# Altium PCB PCB1.PcbDoc
Units mm, origin at the board's own origin, x right, y up, seen from the top; angles counter-clockwise.
Board outline 45 x 118 mm, 2 copper layers (Top Layer, Bottom Layer), stack 1.671 mm thick; 24 components, 34 nets, 95 pads, 10 vias.
Unrouted connection lines stored in the file: 1.
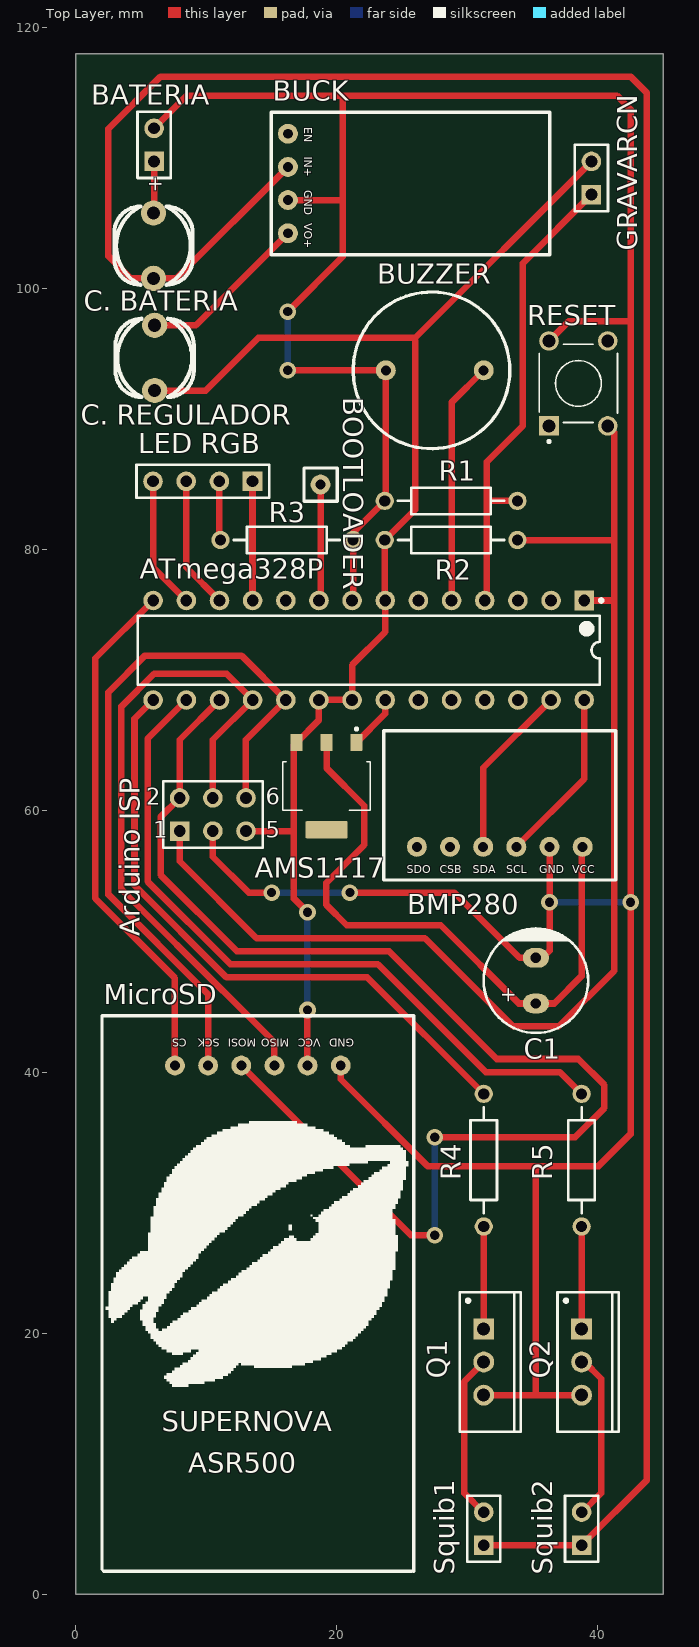
[diagram p0: Top Layer view]
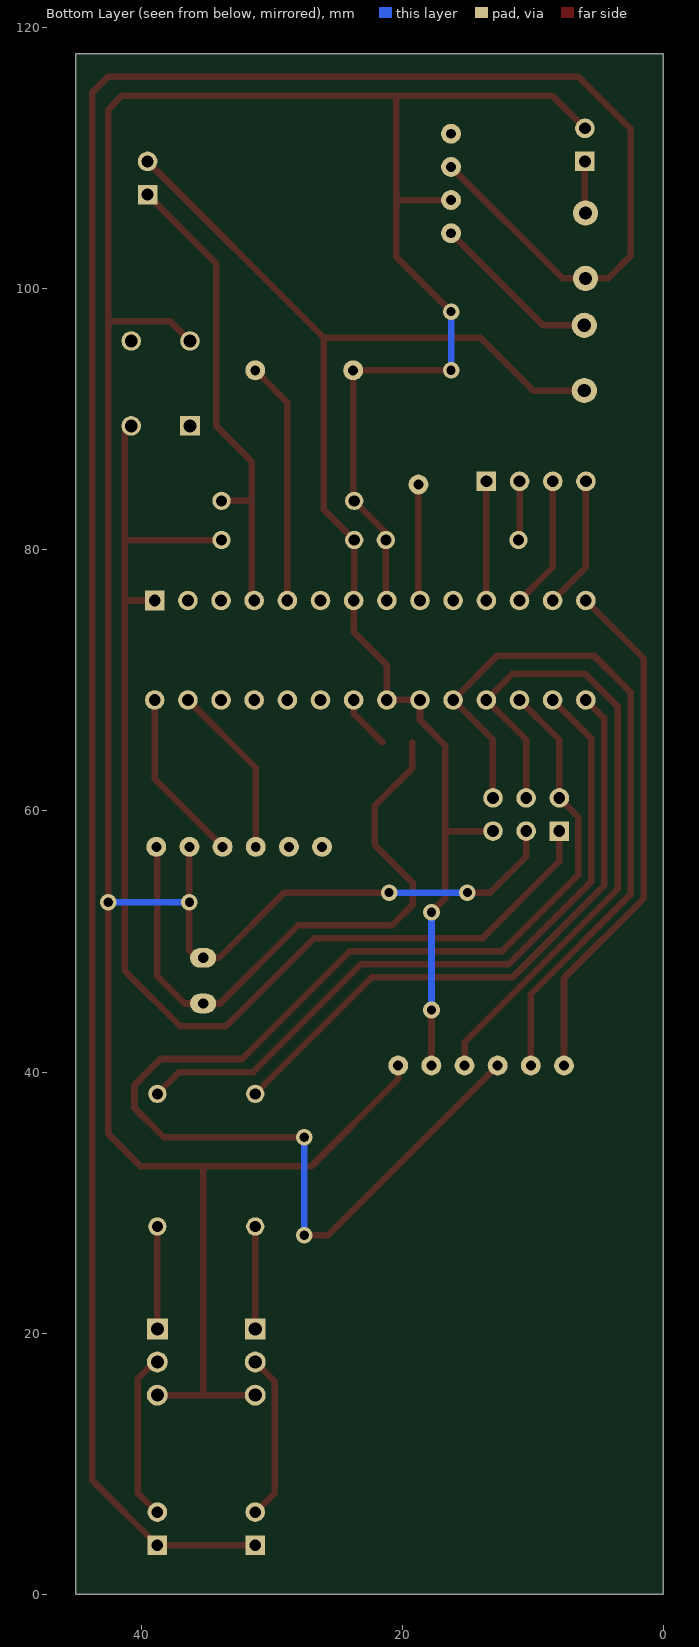
[diagram p1: Bottom Layer view, seen from below]

## Layer stack, top to bottom
Top Solder: solder mask 0.0102, Solder Resist, Dk 3.5
Top Layer: signal copper 0.0356
Dielectric 1: dielectric 1.6, FR-4, Dk 4.8
Bottom Layer: signal copper 0.0356
Bottom Solder: solder mask 0.0102, Solder Resist, Dk 3.5

## Board outline
0,0 0,118 45,118 45,0

## Design rules (kind name [scope] priority, off if disabled: settings)
Clearance [All] p1: gap=0.3 ignorepadtopadclearanceinfootprint=FALSE
PolygonConnect [All] p1: connectstyle=Relief reliefconductorwidth=0.254 reliefentries=4 polygonreliefangle="90 Angle" airgapwidth=0.254
RoutingVias [All] p1: holewidth=0.3 width=0.6 viastyle="Through Hole" minholewidth=0.3 minwidth=0.6 maxholewidth=0.3 maxwidth=0.6
SolderMaskExpansion [All] p1: expansion=0.102
Width [All] p1: maxlimit=1 minlimit=0.3 preferedwidth=0.5
30 further rules are at their usual default settings.

## Components (designator, comment, footprint, x,y, rotation, side; value= is the part's Value field where it differs from the comment)
AMS1117 "AMS1117-3.3" SOT229P700X180-4N 19.21,61.905 r180 top
"Arduino ISP" "Header 3X2" HDR2X3 7.96,58.46 r0 top
ATmega328P "ATmega328P-PU" 28P3 22.44,72.31 r270 top
BATERIA "Battery" BAT-2 6,111.02 r90 top (schematic designator Bateria)
BMP280 "BMP280 Module" "BMP280 Module" 26.13,57.25 r0 top
BOOTLOADER "HEADER1" HEADER1 18.75,85 r90 top
BUCK "MP2315 Buck Module" "MP2315 Buck Module" 16.25,111.87 r270 top
BUZZER "Buzzer" BUZZER 31.25,93.75 r180 top
C1 "10µF" "CAP AL TH D8 L3.5 H12.5" 35.25,47 r90 top
"C. BATERIA" "EVQ-11L07K" EVQ11 6,103.25 r270 top (schematic designator CHAVEBATERIA)
"C. REGULADOR" "EVQ-11L07K" EVQ11 6,94.75 r90 top (schematic designator CHAVEREGULADOR)
GRAVARCN "Header 2" HDR1X2 39.5,107.21 r90 top (schematic designator BOTAOGRAVARCN)
"LED RGB" "Header 4" HDR1X4 13.54,85.25 r180 top
MicroSD "MicroSD Card Module" "MicroSD Card Module" 20.3,40.5 r180 top
Q1 "TIP122" TO-220AB 31.25,17.79 r270 top
Q2 "TIP122" TO-220AB 38.75,17.79 r270 top
R1 "Res2" AXIAL-0.4 28.75,83.75 r0 top value=10K
R2 "Res2" AXIAL-0.4 28.75,80.75 r180 top value=10K
R3 "Res2" AXIAL-0.4 16.17,80.75 r180 top value=1K
R4 "Res2" AXIAL-0.4 31.25,33.25 r270 top value=580
R5 "Res2" AXIAL-0.4 38.75,33.25 r270 top value=10K
RESET "1825910-6" SW_1825910-6-4 38.5,92.75 r90 top (schematic designator BOTAORESET)
Squib1 "Header 2" HDR1X2 31.25,3.75 r90 top
Squib2 "Header 2" HDR1X2 38.75,3.75 r90 top

## Footprints (in the part's own frame and the unit in brackets; to place one, negate y for a bottom-side part, rotate by r counter-clockwise, add the part's x,y. Pads: shape width x height; smd on the part's side, far side on the other; paste and mask are expansions set on the pad)
28P3 [mm] "DIP, 28-Leads, Row Spacing 7.62mm, Pitch 2.54mm, Body 34.67x7.3mm"
  rect 1.5x1.5 hole 0.9: 1(-3.81,16.51)
  round 1.5 hole 0.9: 2(-3.81,13.97) 3(-3.81,11.43) 4(-3.81,8.89) 5(-3.81,6.35) 6(-3.81,3.81) 7(-3.81,1.27) 8(-3.81,-1.27) 9(-3.81,-3.81) 10(-3.81,-6.35) 11(-3.81,-8.89) 12(-3.81,-11.43) 13(-3.81,-13.97) 14(-3.81,-16.51) 15(3.81,-16.51) 16(3.81,-13.97) 17(3.81,-11.43) 18(3.81,-8.89) 19(3.81,-6.35) 20(3.81,-3.81) 21(3.81,-1.27) 22(3.81,1.27) 23(3.81,3.81) 24(3.81,6.35) 25(3.81,8.89) 26(3.81,11.43) 27(3.81,13.97) 28(3.81,16.51)
  silkscreen extent -3.93,-17.7 2.65,17.94, body extent -3.6,-17.65 3.6,17.65, height 4.58
AXIAL-0.4 [mm] "Axial Device, Thru-Hole; 2 Leads; 0.4 in Pin Spacing"
  round 1.4 hole 0.85: 1(-5.08,0) 2(5.08,0)
  silkscreen extent -4.06,-1.02 4.06,1.02
BAT-2 [mm] "Battery; 2 Leads"
  rect 1.5x1.5 hole 0.9: 1(-1.27,0)
  round 1.5 hole 0.9: 2(1.27,0)
  silkscreen extent -2.54,-1.27 2.54,1.27
"BMP280 Module" [mil]
  round 60 hole 30: 1(500,0) 2(400,0) 3(300,0) 4(200,0) 5(100,0) 6(0,0)
  silkscreen extent -100,-100 600,350
BUZZER [mil]
  round 60 hole 30: 1(0,0) 2(295.28,0)
  silkscreen extent -79,-236 394,236
"CAP AL TH D8 L3.5 H12.5" [mm] "8MM Diameter, 3.5MM Lead Spacing Aluminium Capacitor"
  oval 1.5x2 hole 0.8: 1(-1.75,0) 2(1.75,0)
  silkscreen extent -4,-4 4,4, body extent -4,-4 4,4, height 11.5
EVQ11 [mil]
  round 76 hole 39.37: 1(-100.31,-1.89) 2(96.54,-1.89)
  silkscreen extent -120,-120 116,116
HDR1X2 [mm] "Connector; Header; 2 Position"
  rect 1.5x1.5 hole 0.9: 1(0,0)
  round 1.5 hole 0.9: 2(2.54,0)
  silkscreen extent -1.27,-1.27 3.81,1.27
HDR1X4 [mm] "Connector; Header; 4 Position"
  rect 1.5x1.5 hole 0.9: 1(0,0)
  round 1.5 hole 0.9: 2(2.54,0) 3(5.08,0) 4(7.62,0)
  silkscreen extent -1.27,-1.27 8.89,1.27
HDR2X3 [mm] "Connector; Header; 3x2 Position"
  rect 1.5x1.5 hole 0.9: 1(0,0)
  round 1.5 hole 0.9: 2(0,2.54) 3(2.54,0) 4(2.54,2.54) 5(5.08,0) 6(5.08,2.54)
  silkscreen extent -1.27,-1.27 6.35,3.81
HEADER1 [mil]
  round 60 hole 30: 1(0,0)
  silkscreen extent -50,-50 50,50
"MicroSD Card Module" [mil]
  round 60 hole 30: 1(0,0) 2(100,0) 3(200,0) 4(300,0) 5(400,0) 6(500,0)
  silkscreen extent -220,-150 720,1525
"MP2315 Buck Module" [mil]
  round 60 hole 30: 1(0,0) 2(100,0) 3(200,0) 4(300,0)
  silkscreen extent -65,-50 365,790
SOT229P700X180-4N [mm]
  rrect15% 0.93x1.31 smd: 1(-2.29,-3.345) 2(0,-3.345) 3(2.29,-3.345)
  rrect15% 3.24x1.31 smd: 4(0,3.345)
  silkscreen extent -3.36,-4.47 3.36,1.86
SW_1825910-6-4 [mm]
  rect 1.498x1.498 hole 0.99: 1(-3.25,2.25)
  round 1.498 hole 0.99: 2(3.25,2.25) 3(-3.25,-2.25) 4(3.25,-2.25)
  silkscreen extent -4.54,-3 3,3
TO-220AB [mm] "TO, Thru-Hole, Vertical, Heatsink Mounted; 3 In-Line Leads; Pitch 2.54 mm"
  rect 1.6x1.6 hole 1: 1(-2.54,0)
  round 1.6 hole 1: 2(0,0) 3(2.54,0)
  silkscreen extent -5.35,-1.85 5.35,2.85, body extent -5.4,-1.9 5.4,2.9, height 19.3

## Part data
AMS1117: "Sot223/Pkg 1-Amp 3.3-Volt Low Drop Out Voltage Regulatator", Package=None, Availability=Unavailable, MF="Advanced Monolithic Systems", MP=AMS1117-3.3, Price=None, SnapEDA_Link=https://www.snapeda.com/parts/AMS1117-3.3/Advanced%20Monolithic%20Systems/view-part/53450/?ref=snap
"Arduino ISP": "Header, 3-Pin, Dual row", LatestRevisionDate=17-Jul-2002, LatestRevisionNote="Re-released for DXP Platform.", Publisher="Altium Limited"
ATmega328P: "8-bit AVR Microcontroller, 32KB Flash, 1KB EEPROM, 2KB SRAM, 28-pin PDIP, Industrial Grade (-40°C to 85°C)", Supplier Part Number 1=ATMEGA328P-PU-ND, ComponentLink1Description="Manufacturer Link", ComponentLink1URL=http://www.atmel.com/products/avr/default.asp?, ComponentLink2Description="ATmega48A/48PA/88A/88PA/168A/168PA/328/328P Datasheet", ComponentLink2URL=http://www.atmel.com/dyn/resources/prod_documents/8271.pdf, ComponentLink3Description="ATmega48A/48PA/88A/88PA/168A/168PA/328/328P Summary", ComponentLink3URL=http://www.atmel.com/dyn/resources/prod_documents/8271S.pdf, ComponentLink4Description="Atmel.com Home", ComponentLink4URL=http://www.atmel.com, DatasheetVersion="revA, Jan-2010", PackageDescription="28-lead (0.300\"/7.62mm Wide) Plastic Dual Inline Package (PDIP)", PackageReference=28P3, PackageVersion="revB, Sep-2001", Published=1-Apr-2010, Publisher="Altium Limited", Supplier 1=Digi-Key, Supplier 2=Farnell, Supplier 3=Mouser, Supplier Part Number 2=1715487, Supplier Part Number 3=556-ATMEGA328P-PU
BATERIA: "Multicell Battery", LatestRevisionDate=17-Jul-2002, LatestRevisionNote="Re-released for DXP Platform.", PackageDescription="Battery; 2 Leads", PackageReference=BAT-2, Published=24-Mar-1999, Publisher="Altium Limited"
BMP280: "BMP280 Module REF. 9SS08"
C1: library part UKL2A100MPD1TD, "CAP ALUM 10UF 20% 100V RADIAL", Device Package="Radial, Can", Lifetime @ Temp.="2000 Hrs @ 85°C", Manufacturer=Nichicon, Operating Temperature="-40°C ~ 85°C", Ripple Current @ High Frequency="180mA @ 10kHz", Ripple Current @ Low Frequency="90mA @ 120Hz", Supplier Part Number 1=493-10590-1-ND, Tolerance=±20%, Voltage - Rated=100V, Applications="General Purpose", Capacitance=10µF, ComponentLink1Description=Datasheet, ComponentLink1URL=http://nichicon-us.com/english/products/pdfs/e-ukl.pdf, ComponentLink2Description="DigiKey Link", ComponentLink2URL=http://digikey.com/product-detail/en/nichicon/UKL2A100MPD1TD/493-10590-1-ND/4317611, Height - Seated (Max)="0.492\" (12.50mm)", LastUpdated="21/01/2020 03:40:57", Lead Spacing="0.138\" (3.50mm)", Lifecycle Status=Active, Minimum Order=1, Mounting Type="Through Hole", Package / Case="Radial, Can", Packaging=TapeAndBox, PartId=7259, Part Number=UKL2A100MPD1TD, Part Status=Active, Polarization=Polar, Price=0.13, Series=UKL, Size / Dimension="0.315\" Dia (8.00mm)", Supplier 1=DigiKey
"C. BATERIA" "C. REGULADOR": "Tactile Switch SPST-NO Top Actuated Through Hole", Package=None, Availability=Unavailable, MF=Panasonic, MP=EVQ-11L07K, Price=None, SnapEDA_Link=https://www.snapeda.com/parts/EVQ-11L07K/Panasonic%20Electronic%20Components/view-part/310716/?ref=snap
GRAVARCN Squib1 Squib2: "Header, 2-Pin", LatestRevisionDate=17-Jul-2002, LatestRevisionNote="Re-released for DXP Platform.", Publisher="Altium Limited"
"LED RGB": "Header, 4-Pin", LatestRevisionDate=17-Jul-2002, LatestRevisionNote="Re-released for DXP Platform.", Publisher="Altium Limited"
MicroSD: "MicroSD Card Module REF. 4MD36"
Q1 Q2: "Trans Darlington NPN 100V 5A 2000mW Automotive 3-Pin(3+Tab) TO-220 Bag", Package=None, Availability=Unavailable, DigiKey-Purchase-URL=https://snapeda.com/shop?store=DigiKey&id=4804824, MF="NTE Electronics, Inc", Mouser-Purchase-URL=https://snapeda.com/shop?store=Mouser&id=4804824, MP=TIP122, Price=None, SnapEDA_Link=https://www.snapeda.com/parts/TIP122/NTE%20Electronics/view-part/4804824/?ref=snap
R1 R2 R3 R4 R5: "Resistor", LatestRevisionDate=17-Jul-2002, LatestRevisionNote="Re-released for DXP Platform.", PackageDescription="Axial Device, Thru-Hole; 2 Leads; 0.4 in Pin Spacing", PackageReference=AXIAL-0.4, Published=8-Jun-2000, Publisher="Altium Limited"
RESET: "Switch Push Button OFF _ON_ SPST Round Button 0.05A 24VDC Momentary Contact PC Pins Thru-Hole", Contact_Current_Rating="50 mA", Package=None, Configuration_Pole-Throw="Single Pole - Single Throw", Digi-Key_Part_Number=450-1650-ND, Digi-Key_Purchase_URL=https://www.digikey.com/product-detail/en/te-connectivity-alcoswitch-switches/1825910-6/450-1650-ND/1632536?utm_source=snapeda&utm_medium=aggregator&utm_campaign=symbol, EU_RoHS_Compliance=Compliant, MF="TE Connectivity", MP=1825910-6, SnapEDA_Link=https://www.snapeda.com/parts/1825910-6/TE%20Connectivity%20ALCOSWITCH%20Switches/view-part/424522/?ref=snap, TE_purchase_URL=https://www.te.com/usa-en/product-1825910-6.html?te_bu=Cor&te_type=disp&te_campaign=seda_glo_cor-seda-global-disp-prtnr-fy19-seda-model-bom-cta_sma-317_1&elqCampaignId=32493

## Via types
v1: diameter 1.27, hole 0.711, Top Layer to Bottom Layer, 10 vias

## Nets (pads, with @x,y where several pads share a name; then routed paths per layer and width w, separated by ;. In a path a pad name is that pad's centre, name@x,y a point inside that pad or via, vN(x,y) a via of type N, cw(c..) or ccw(c..) an arc to the next point about the centre after c; other vN are vias at no path point)
1: "Arduino ISP.1" ATmega328P.1 R2.1 RESET.3 | length 94.3
  Top Layer w0.5: 7.96,58.46 7.96,56.14 13.85,50.25 26.75,50.25 33.5,43.5 37,43.5 41.25,47.75 41.25,76.25 ; R2.1 41.25,80.75 ; ATmega328P.1 41.12,76.12 41.25,76.25 ; RESET.3 41.25,89 41.25,80.75 ; 41.25,76.25 41.25,80.75
2: ATmega328P.2
3: ATmega328P.3
3V3: AMS1117.2 BMP280.1 C1.1 | length 48.3
  Top Layer w0.5: AMS1117.2 19.21,63.29 22.1,60.4 22.1,57.4 19.2,54.5 19.2,52.8 20.75,51.25 27.95,51.25 33.95,45.25 C1.1 36.65,45.25 38.75,47.35 38.75,57.17 BMP280.1
4: ATmega328P.4 GRAVARCN.1 R1.2 | length 36.8
  Top Layer w0.5: ATmega328P.4 31.5,76.29 31.5,83.75 ; R1.2 31.5,83.75 ; GRAVARCN.1 34.25,101.96 34.25,89.5 31.5,86.75 31.5,83.75
5: ATmega328P.5 BUZZER.1 | length 18.6
  Top Layer w0.5: ATmega328P.5 28.79,91.29 BUZZER.1
5V: "C. REGULADOR.2" BUCK.4 | length 13.1
  Top Layer w0.5: 6.048,97.202 9.202,97.202 BUCK.4
6: ATmega328P.6
9: ATmega328P.9 BOOTLOADER.1 | length 8.9
  Top Layer w0.5: ATmega328P.9 18.75,76.24 BOOTLOADER.1
10: ATmega328P.10
11: "LED RGB.1" ATmega328P.11 | length 9.1
  Top Layer w0.5: 13.54,85.25 13.54,76.13 ATmega328P.11
12: "LED RGB.3" ATmega328P.12 | length 10.2
  Top Layer w0.5: 8.46,85.25 8.46,78.67 ATmega328P.12
13: "LED RGB.4" ATmega328P.13 | length 10.2
  Top Layer w0.5: 5.92,85.25 5.92,78.67 ATmega328P.13
14: ATmega328P.14 MicroSD.6 | length 40
  Top Layer w0.5: ATmega328P.14 1.5,71.69 1.5,53.3 7.6,47.2 MicroSD.6
15: ATmega328P.15 R4.1 | length 48.2
  Top Layer w0.5: ATmega328P.15 4.5,67.07 4.5,54.3 11.55,47.25 22.33,47.25 R4.1
16: ATmega328P.16 R5.1 | length 55.1
  Top Layer w0.5: ATmega328P.16 5.5,65.53 5.5,54.6 11.85,48.25 23.15,48.25 31.4,40 37.08,40 R5.1
17: "Arduino ISP.2" ATmega328P.17 MicroSD.4 | length 99.3
  Top Layer w0.5: ATmega328P.17 7.96,65.45 7.96,61 6.5,59.54 6.5,55.1 12.35,49.25 24,49.25 32.25,41 38.5,41 40.5,39 40.5,37.25 38.25,35 v1(27.5,35) ; MicroSD.4 25.68,27.5 v1(27.5,27.5)
  Bottom Layer w0.5: v1(27.5,27.5) v1(27.5,35)
18: "Arduino ISP.4" ATmega328P.18 MicroSD.3 | length 53
  Top Layer w0.5: 10.5,61 10.5,65.45 ATmega328P.18 11.55,70.5 6,70.5 3.5,68 3.5,54 4.1,53.4 4.1,53.387 11.287,46.2 11.3,46.2 15.22,42.28 MicroSD.3
19: "Arduino ISP.6" ATmega328P.19 MicroSD.5 | length 56.7
  Top Layer w0.5: MicroSD.5 10.14,45.96 2.5,53.6 2.5,69.1 5.3,71.9 12.69,71.9 ATmega328P.19 13.04,65.45 13.04,61
23: ATmega328P.23
24: ATmega328P.24
25: ATmega328P.25
26: ATmega328P.26
27: ATmega328P.27 BMP280.4 | length 13.4
  Top Layer w0.5: BMP280.4 31.21,63.3 ATmega328P.27
28: ATmega328P.28 BMP280.3 | length 13.4
  Top Layer w0.5: BMP280.3 38.95,62.45 ATmega328P.28
GND: "Arduino ISP.3" AMS1117.1 ATmega328P.8 ATmega328P.22 BATERIA.2 BMP280.2 BUCK.3 BUZZER.2 C1.2 MicroSD.1 Q1.3 Q2.3 R1.1 R3.1 RESET.2 | length 278.4
  Top Layer w0.5: BATERIA.2 8.51,114.8 20.46,114.8 ; 10.5,58.46 10.5,56.5 13.25,53.75 v1(15,53.75) ; v1(16.25,93.75) BUZZER.2 23.75,83.83 R1.1 21.25,81.33 R3.1 21.25,76.2 ATmega328P.8 ; v1(16.25,98.25) 20.46,102.46 20.46,106.79 ; BUCK.3 20.46,106.79 ; MicroSD.1 20.3,39.45 26.95,32.8 35.25,32.8 ; v1(21,53.75) 29,53.75 34,48.75 C1.2 35.75,48.75 36.29,49.29 v1(36.29,53) BMP280.2 ; AMS1117.1 23.71,67.46 ATmega328P.22 ; Q1.3 35.25,15.25 ; RESET.2 37.75,97.5 42.5,97.5 ; Q2.3 35.25,15.25 ; 20.46,106.79 20.46,114.8 ; 20.46,114.8 41.45,114.8 42.5,113.75 42.5,97.5 ; 35.25,15.25 35.25,32.8 ; 35.25,32.8 40.05,32.8 42.5,35.25 42.5,97.5
  Bottom Layer w0.5: v1(15,53.75) v1(21,53.75) v1@21.25,53.75 ; v1(16.25,93.75) v1(16.25,98.25) ; v1(36.29,53) v1(42.5,53)
"NetLED RGB_2": "LED RGB.2" R3.2 | length 4.5
  Top Layer w0.5: 11,85.25 11,80.84 R3.2
NetQ1_1: Q1.1 R4.2 | length 7.8
  Top Layer w0.5: Q1.1 R4.2
NetQ2_1: Q2.1 R5.2 | length 7.8
  Top Layer w0.5: Q2.1 R5.2
NO1: Q1.2 Squib1.2 | length 12.8
  Top Layer w0.5: Q1.2 29.75,16.29 29.75,7.75 31.21,6.29 Squib1.2 Squib1.2@31.29,6.29
NO2: Q2.2 Squib2.2 | length 12.9
  Top Layer w0.5: Squib2.2 38.79,6.29 40.25,7.75 40.25,16.5 38.96,17.79 Q2.2
PLUSLE: "C. BATERIA.1" BATERIA.1 | length 4
  Top Layer w0.5: 5.952,105.798 6,105.846 BATERIA.1
VCC: "Arduino ISP.5" "C. REGULADOR.1" AMS1117.3 ATmega328P.7 ATmega328P.20 ATmega328P.21 GRAVARCN.2 MicroSD.2 R2.2 | length 105.7
  Top Layer w0.5: 6.048,92.202 9.952,92.202 14,96.25 26,96.25 GRAVARCN.2 ; 13.04,58.46 16.71,58.46 ; v1(17.75,44.75) 17.75,40.51 MicroSD.2 ; v1(17.75,52.25) 16.71,53.29 16.71,58.46 ; 26,96 26,83.08 R2.2 23.67,76.16 ATmega328P.7 23.71,73.71 21.17,71.17 ATmega328P.21 ATmega328P.20 18.63,66.96 AMS1117.3 16.71,65.04 16.71,58.46
  Bottom Layer w0.5: v1(17.75,44.75) v1(17.75,52.25)
VCC1: "C. BATERIA.2" BUCK.2 Squib1.1 Squib2.1 | length 192
  Top Layer w0.5: BUCK.2 7.718,100.798 5.952,100.798 4.202,100.798 2.5,102.5 2.5,112.25 6.5,116.25 42.5,116.25 43.75,115 43.75,8.75 Squib2.1 Squib1.1
pads on no net: AMS1117.4 BMP280.5 BMP280.6 BUCK.1 RESET.1 RESET.4

## Silkscreen, mask and mechanical layers (free items; w line width, h text height)
Top Overlay:
  drawing of 2 lines, arcs and shapes, not listed
  text "SUPERNOVA" at 6.6,12.5 h1.52
  text "ASR500" at 8.6,9.3 h1.52

## Text inside footprints (layer, text, board x,y; h text height)
"Arduino ISP": Top Overlay "6" at 14.564,60.492 h1.27; Top Overlay "5" at 14.564,57.952 h1.27; Top Overlay "2" at 5.42,60.492 h1.27; Top Overlay "1" at 5.928,57.952 h1.27
BATERIA: Top Overlay "+" at 6.577,107.35 h1.15 r90
BMP280: Top Overlay "VCC" at 38.043,55.218 h0.61; Top Overlay "GND" at 35.503,55.218 h0.61; Top Overlay "SCL" at 32.963,55.218 h0.61; Top Overlay "SDA" at 30.423,55.218 h0.61; Top Overlay "CSB" at 27.883,55.218 h0.61; Top Overlay "SDO" at 25.343,55.218 h0.61
BUCK: Top Overlay "VO+" at 17.52,105.012 h0.61 r270; Top Overlay "GND" at 17.52,107.552 h0.61 r270; Top Overlay "IN+" at 17.52,110.092 h0.61 r270; Top Overlay "EN" at 17.52,112.378 h0.61 r270
C1: Top Overlay "+" at 34,45.25 h2 r90
MicroSD: Top Overlay "GND" at 21.316,42.532 h0.61 r180; Top Overlay "VCC" at 18.776,42.532 h0.61 r180; Top Overlay "MISO" at 16.363,42.532 h0.61 r180; Top Overlay "MOSI" at 13.823,42.532 h0.61 r180; Top Overlay "SCK" at 11.029,42.532 h0.61 r180; Top Overlay "CS" at 8.489,42.532 h0.61 r180